# Altium PCB LM35_7107.PcbDoc
Units mm, origin at the board's own origin, x right, y up, seen from the top; angles counter-clockwise.
Board outline 62.81 x 59.51 mm, 2 copper layers (Top Layer, Bottom Layer); 30 components, 48 nets, 138 pads, 26 vias.
Unrouted connection lines stored in the file: 1.
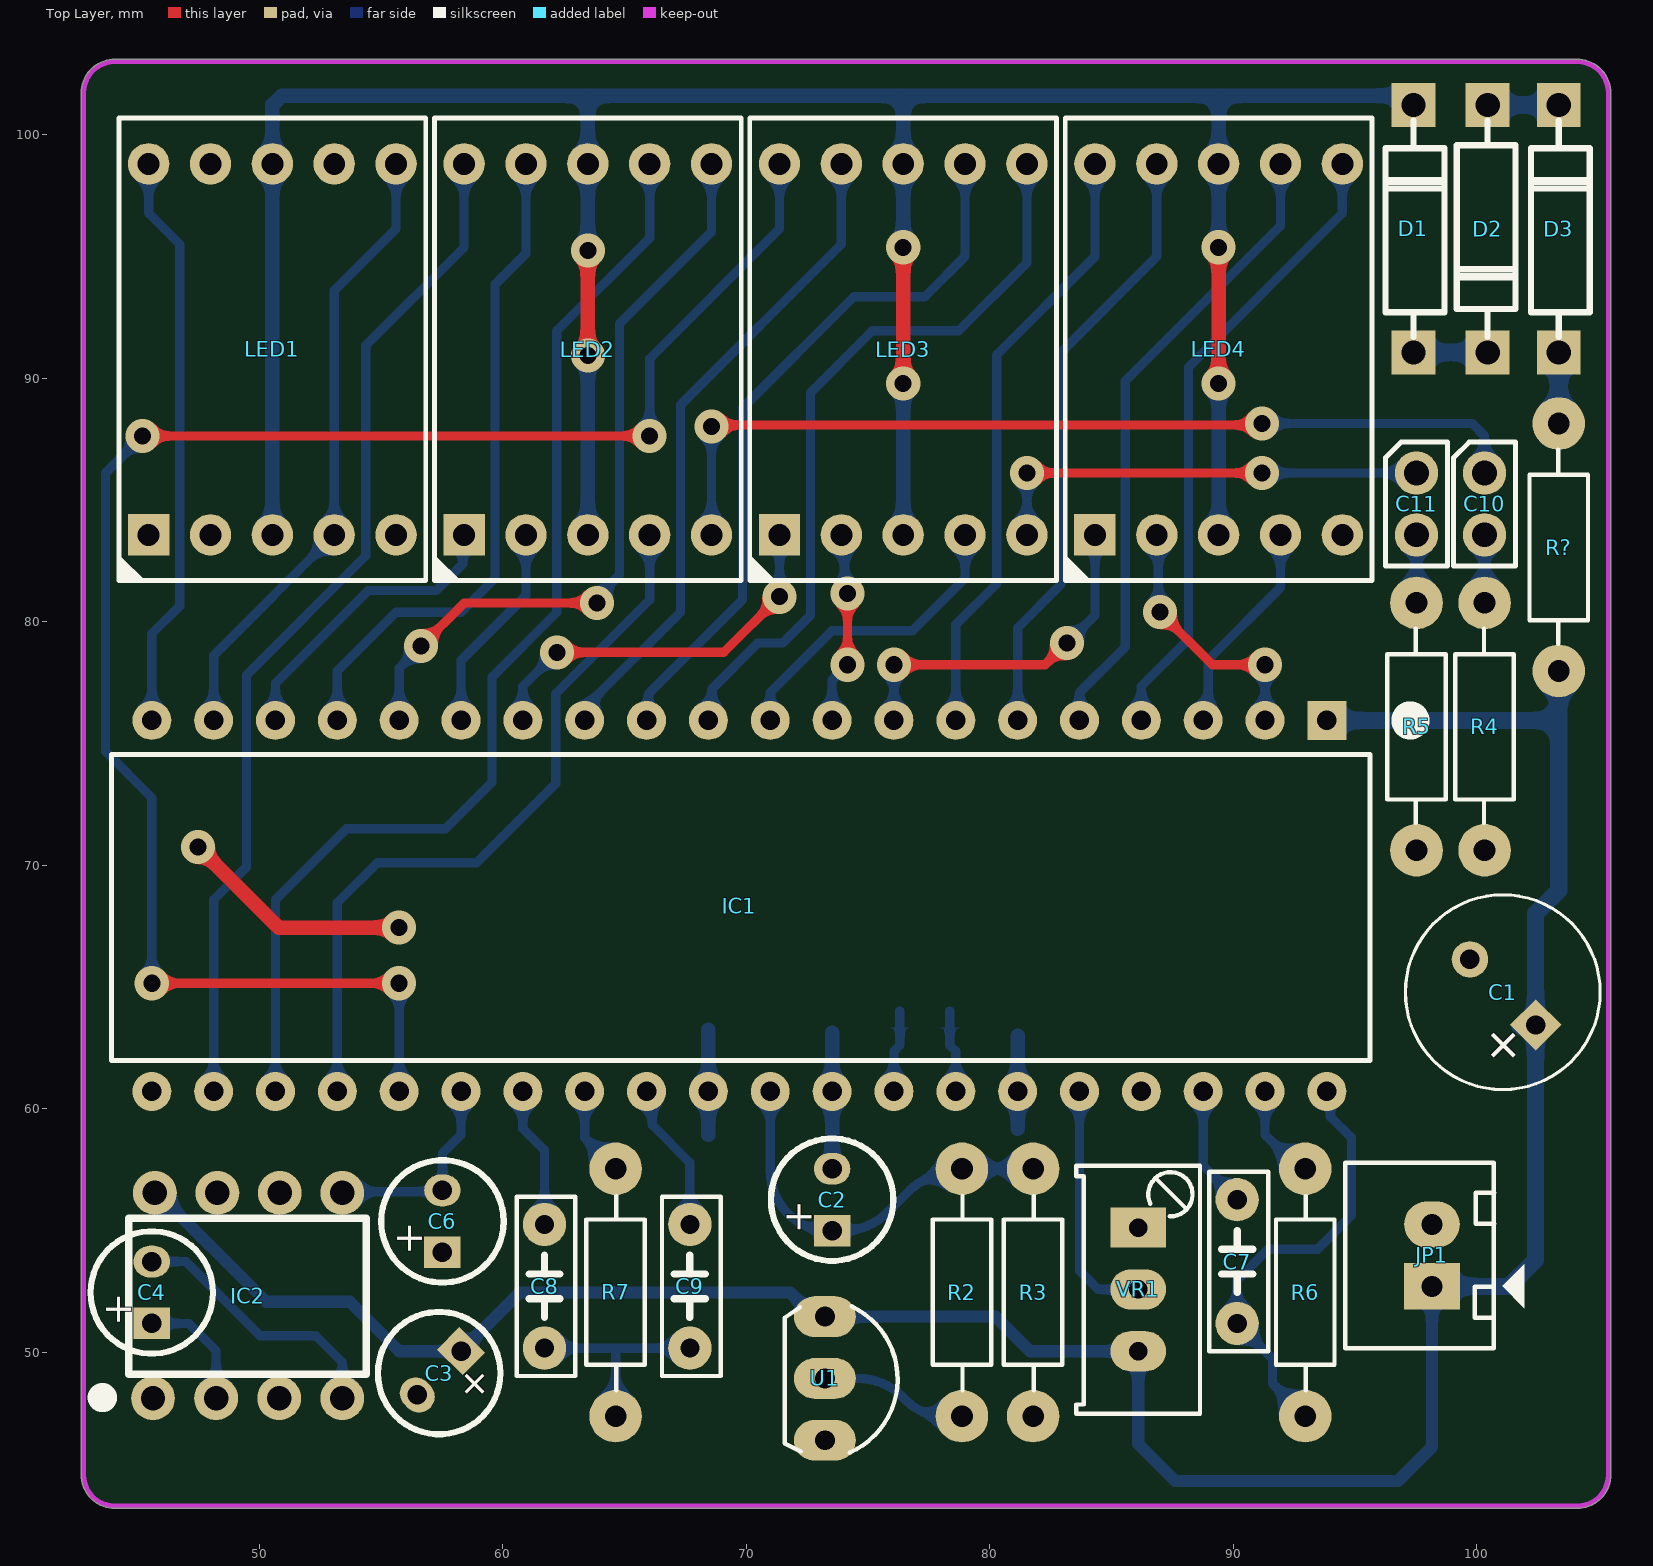
[diagram p0: Top Layer view]
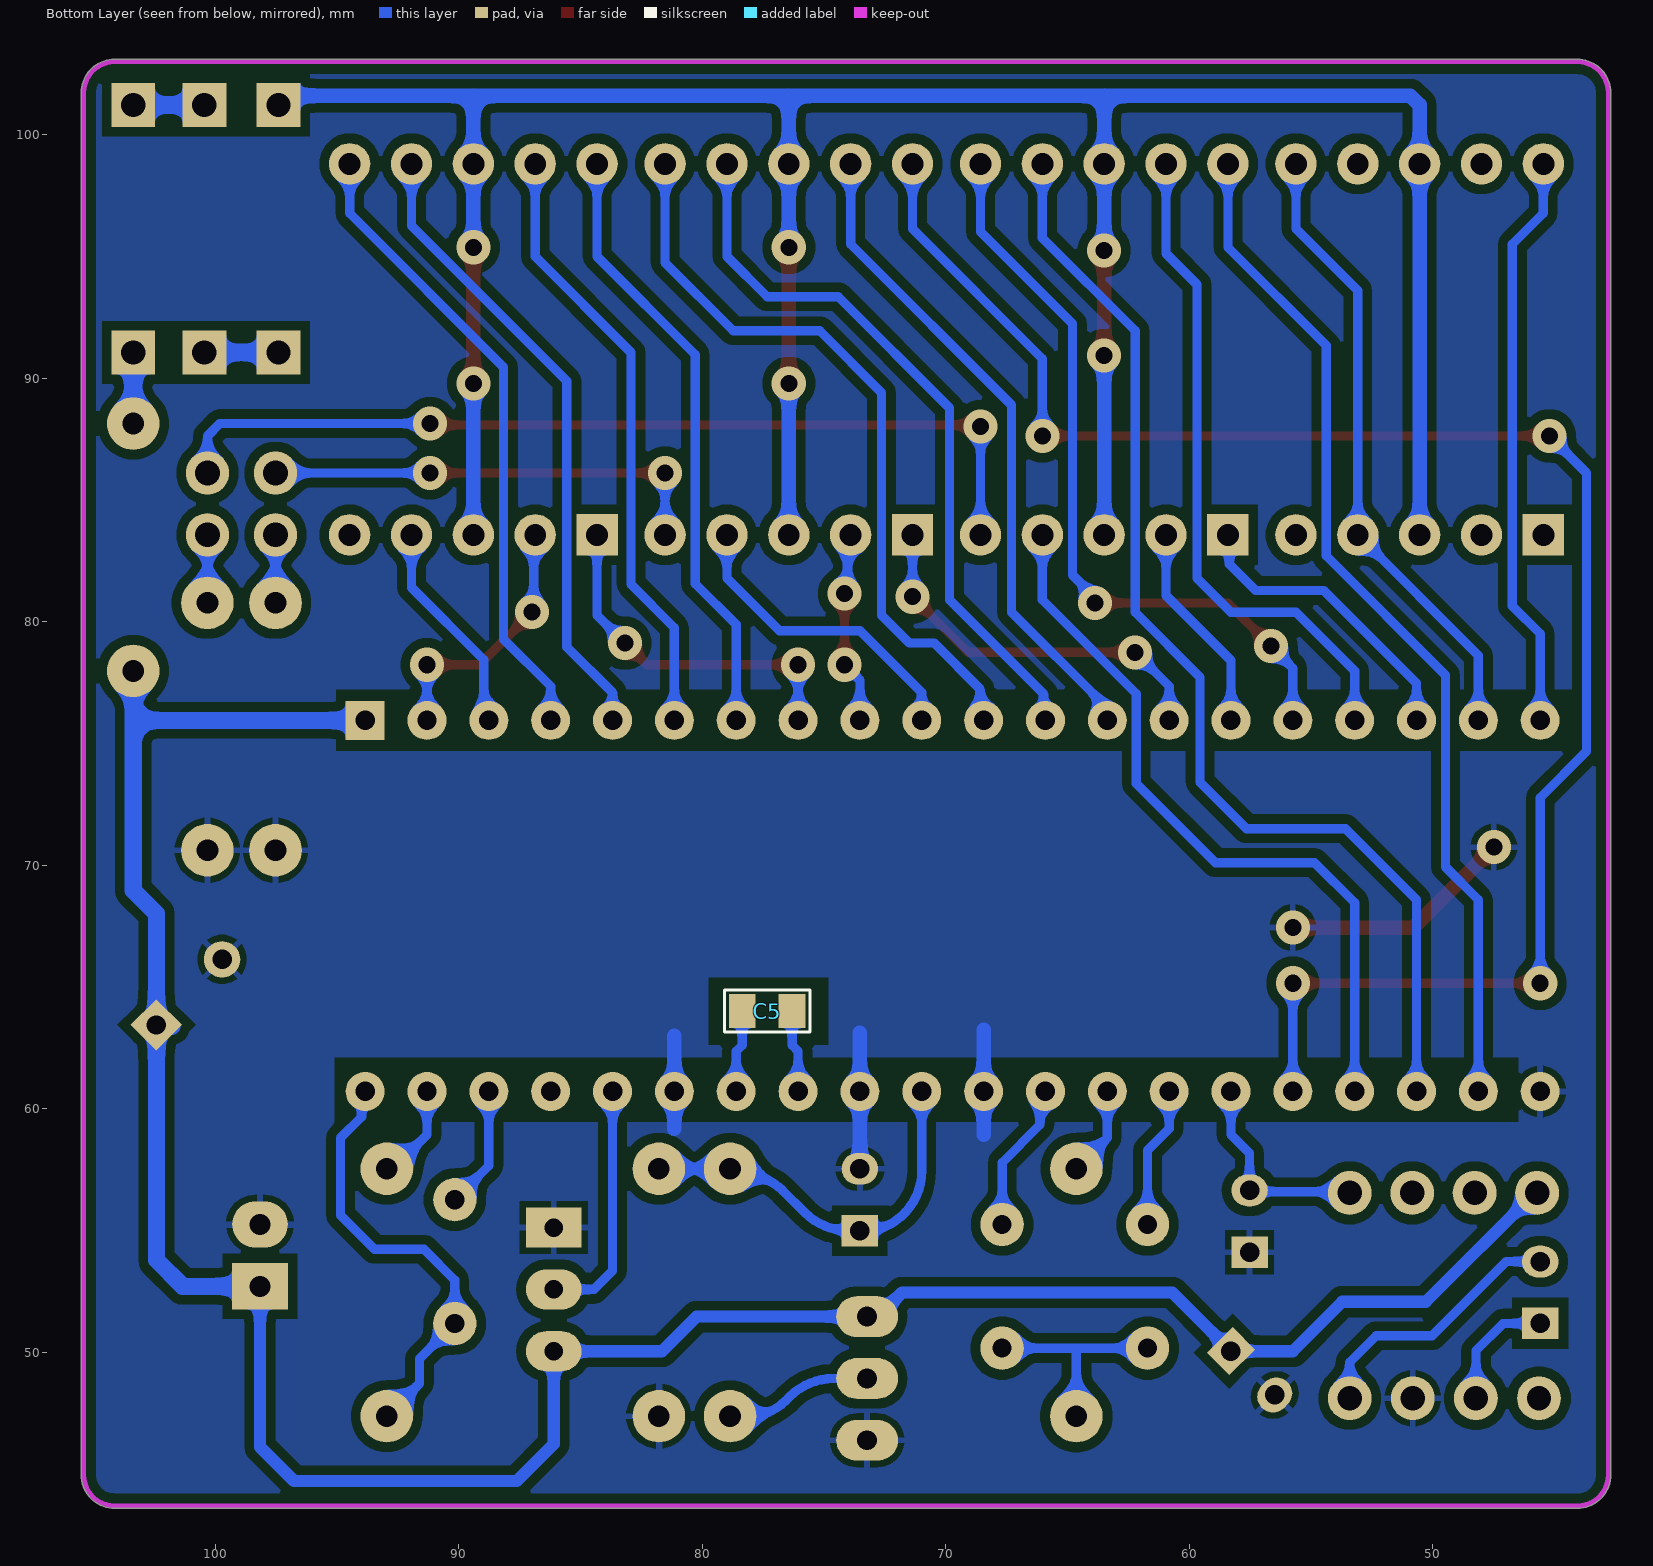
[diagram p1: Bottom Layer view, seen from below]
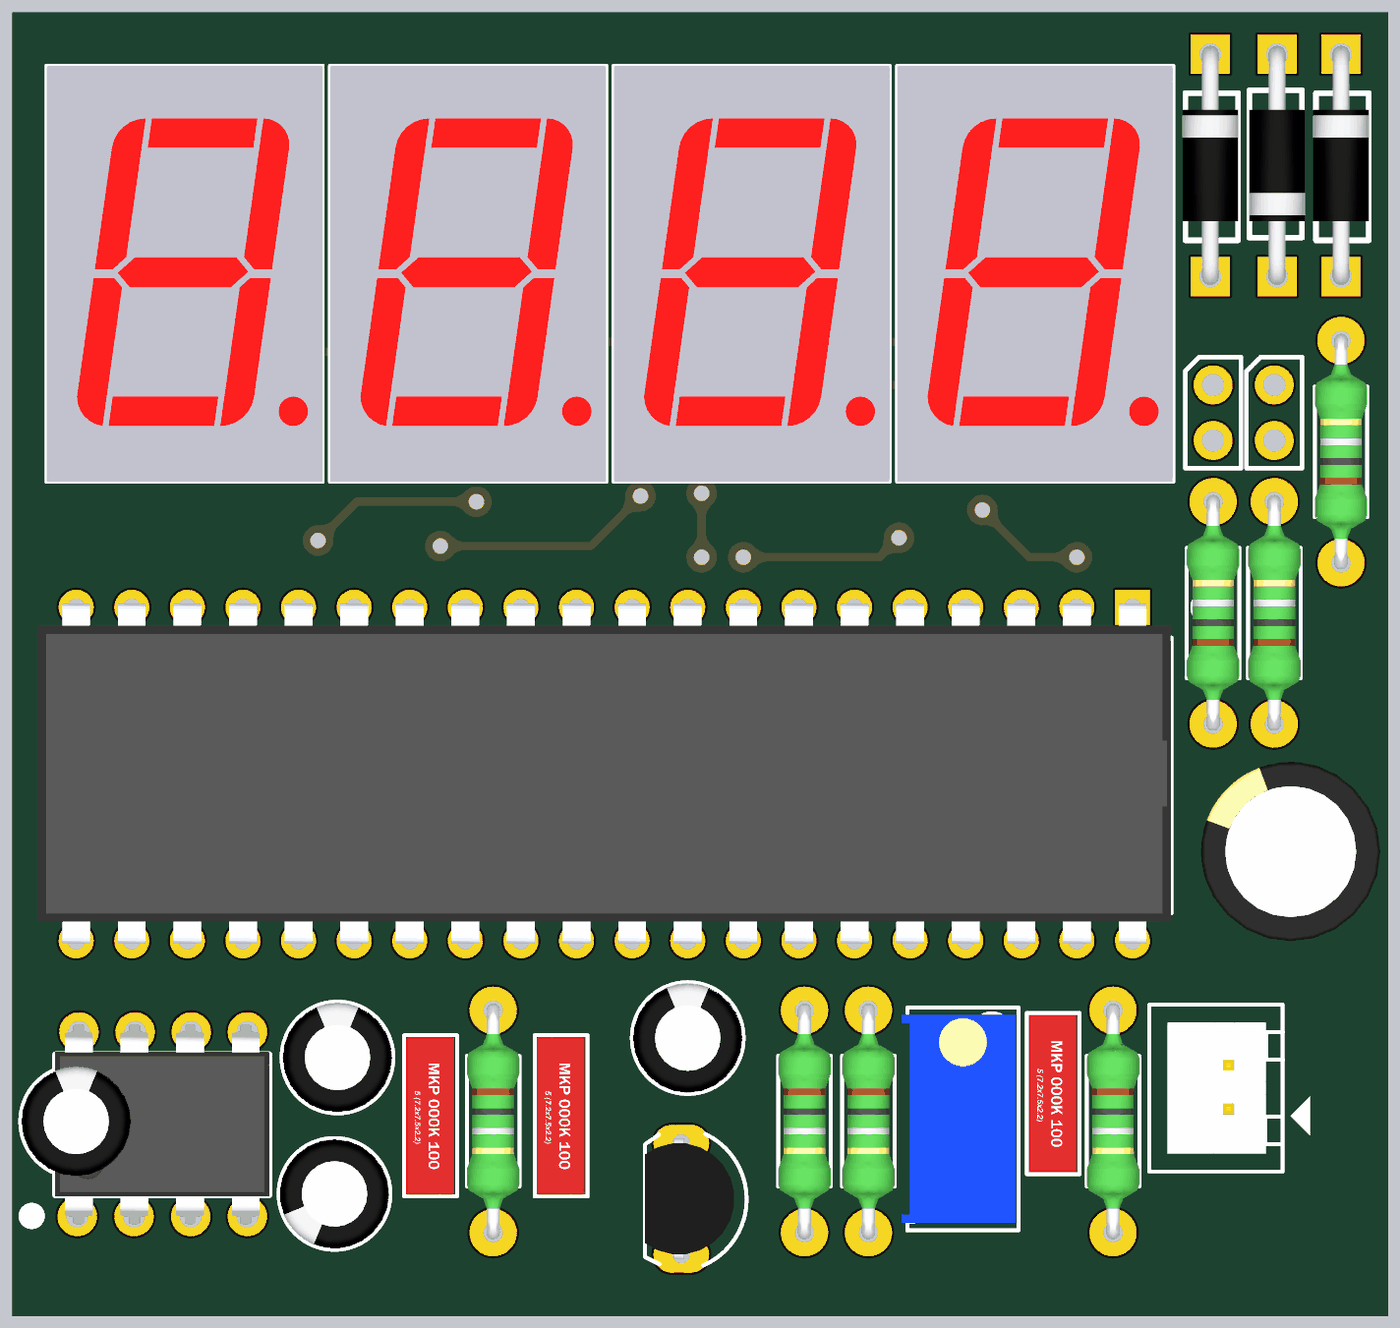
[diagram p2: 3D render of the assembled board from above, using the file's embedded part models]

## Layer stack, top to bottom
Top Solder: solder mask 0.0102, Solder Resist, Dk 3.5
Top Layer: signal copper 0.0356
Dielectric 1: dielectric 0.32, FR-4, Dk 4.8
Bottom Layer: signal copper 0.0356
Bottom Solder: solder mask 0.0102, Solder Resist, Dk 3.5

## Board outline
44.069,43.588 cw(c44.07,44.959) 42.699,44.957 42.699,46.736 42.699,44.958 42.699,101.727 cw(c44.069,101.727) 44.069,103.097 104.14,103.097 cw(c104.14,101.727) 105.51,101.727 105.51,101.092 105.51,45.467 105.51,44.958 cw(c104.14,44.958) 104.14,43.588

## Design rules (kind name [scope] priority, off if disabled: settings)
Clearance [All] p1: gap=0.4 ignorepadtopadclearanceinfootprint=FALSE except(0: Arc-Hole Track-Hole SMDPad-Hole THPad-Hole Via-Hole Fill-Hole Poly-Hole Region-Hole Text-Hole; 0.2: Arc-THPad Arc-Via Track-THPad Track-Via; 0.3: Arc-SMDPad Arc-Text Track-SMDPad Track-Text SMDPad-SMDPad SMDPad-THPad SMDPad-Via SMDPad-Text THPad-THPad THPad-Via THPad-Text Via-Via Via-Text Fill-Text Poly-Text Region-Text Text-Text; 0.35: Arc-Arc Arc-Track Track-Track)
PolygonConnect [All] p1: connectstyle=Relief reliefconductorwidth=0.254 reliefentries=4 polygonreliefangle="90 Angle" airgapwidth=0.254
RoutingVias [All] p1: holewidth=0.711 width=1.27 viastyle="Through Hole" minholewidth=0.711 minwidth=1.27 maxholewidth=0.711 maxwidth=1.27
SolderMaskExpansion [All] p1: expansion=0.102 istentingtop=FALSE
Width [All] p1: maxlimit=3 minlimit=0.254 preferedwidth=0.3
30 further rules are at their usual default settings.

## Components (designator, comment, footprint, x,y, rotation, side; value= is the part's Value field where it differs from the comment)
C1 "22uF" C8MM 101.078,64.784 r135 top value=?
C2 "2.2uF" C5mm 73.533,56.261 r90 top value=?
C3 "10uF" C5mm 57.395,49.14 r225 top value=?
C4 "10uF" C5mm 45.593,52.451 r90 top value=?
C5 "0.1uF" CN-SMD-0805 77.343,64.008 r180 bottom value=0,1uF/300V
C6 "47uF" C5mm 57.531,55.372 r90 top value=?
C7 "100pF" CN2-R 90.17,53.721 r90 top value=33pF
C8 "1uF" CN2-R 61.722,52.705 r90 top value=33pF
C9 "470nF" CN2-R 67.691,52.705 r90 top value=33pF
C10 "JP2" JP2-CLOSED 100.33,86.106 r0 top
C11 "JP2" JP2-CLOSED 97.536,86.106 r0 top
D1 "1N4148" DIODE/POW/1A 97.409,91.059 r90 top value=1N5007
D2 "1N4148" DIODE/POW/1A 100.457,101.219 r270 top value=1N5007
D3 "1N4148" DIODE/POW/1A 103.378,91.059 r90 top value=1N5007
IC1 "ICL7107" DIP-40 68.707,67.564 r270 top locked
IC2 "ICL7660" DIP-8 49.53,52.324 r90 top
JP1 "JP2" CON2 98.171,52.705 r90 top value="Connector 2"
LED1 "5611BS" "7SEG-0.56\""#1 50.546,91.186 r0 top locked
LED2 "5611BS" "7SEG-0.56\""#2 63.5,91.186 r0 top locked
LED3 "5611BS" "7SEG-0.56\""#2 76.454,91.186 r0 top locked
LED4 "5611BS" "7SEG-0.56\""#2 89.408,91.186 r0 top locked
R2 "10K" RES-1/4W 78.994,52.832 r90 top
R3 "?k" RES-1/4W 81.915,52.832 r90 top
R4 "220R" RES-1/4W 100.203,75.311 r270 top
R5 "220R" RES-1/4W 97.409,75.311 r270 top
R6 "100K" RES-1/4W 93.091,52.832 r90 top
R7 "210K" RES-1/4W 64.77,52.832 r90 top
R? "68R" RES-1/4W 103.251,82.677 r270 top
U1 "LM35" QTO-92 73.239,48.919 r270 top
VR1 "1K" VR2 86.106,55.118 r270 top

## Footprints (in the part's own frame and the unit in brackets; to place one, negate y for a bottom-side part, rotate by r counter-clockwise, add the part's x,y. Pads: shape width x height; smd on the part's side, far side on the other; paste and mask are expansions set on the pad)
"7SEG-0.56\""#1 [mm]
  rect 1.7x1.7 hole 0.9: 1(-5.08,-7.62)
  round 1.7 hole 0.9: 3(0,-7.62) 4(2.54,-7.62) 5(5.08,-7.62) 6(5.08,7.62) 7(2.54,7.62) 8(0,7.62) 9(-2.54,7.62) 10(-5.08,7.62) ""(-2.54,-7.62)
  silkscreen extent -6.3,-9.53 6.3,9.5, body extent -6.3,-9.5 6.3,9.5, height 8
"7SEG-0.56\""#2 [mm]
  rect 1.7x1.7 hole 0.9: 1(-5.08,-7.62)
  round 1.7 hole 0.9: 2(-2.54,-7.62) 3(0,-7.62) 4(2.54,-7.62) 5(5.08,-7.62) 6(5.08,7.62) 7(2.54,7.62) 8(0,7.62) 9(-2.54,7.62) 10(-5.08,7.62)
  silkscreen extent -6.3,-9.53 6.3,9.5, body extent -6.3,-9.5 6.3,9.5, height 8
C5mm [mm]
  rect 1.3x1.5 hole 0.8: 1(-1.27,0)
  oval 1.3x1.5 hole 0.8: 2(1.27,0)
  silkscreen extent -2.51,-2.51 2.51,2.51, body extent -2.5,-2.5 2.49,2.5, height 11.01
C8MM [mm]
  rect 1.5x1.5 hole 0.8: 1(-1.905,0)
  round 1.5 hole 0.8: 2(1.905,0)
  silkscreen extent -4,-4 4,4, body extent -4.1,-4.1 4.1,4.1, height 14.4
CN2-R [mil]
  round 70 hole 31: 1(-100,0) 2(100,0)
  silkscreen extent -145,-50 145,45, body extent -142,-45 142,42, height 336
CN-SMD-0805 [mm]
  rect 1.1x1.4 smd: 1(-1.025,0) 2(1.025,0)
  silkscreen extent -1.75,-0.86 1.75,0.86, body extent -1,-0.63 1,0.62, height 0.8
CON2 [mil] "CON2"
  rect 75x90 hole 34: 1(0,0)
  oval 75x90 hole 34: 2(100,0)
  silkscreen extent -100,-150 200,140, body extent -68,-70 168,107, height 236
DIODE/POW/1A [mm]
  rect 1.8x1.8 hole 1: 1(0,0) 2(10.16,0)
  silkscreen extent 0.64,-1.27 9.53,1.14, body extent -0.38,-1.28 10.54,1.28, height 2.55
DIP-8 [mm]
  round 1.8 hole 1: 1(-4.216,3.886) 2(-4.216,1.295) 3(-4.216,-1.295) 4(-4.216,-3.886) 5(4.216,-3.886) 6(4.216,-1.321) 7(4.216,1.245) 8(4.216,3.81)
  silkscreen extent -4.29,-4.88 3.17,6.07, body extent -4.57,-4.9 4.57,4.9, height 4.6
DIP-40 [mm]
  rect 1.6x1.6 hole 0.8: 1(-8.382,25.146)
  round 1.6 hole 0.8: 2(-8.382,22.606) 3(-8.382,20.066) 4(-8.382,17.526) 5(-8.382,14.986) 6(-8.382,12.446) 7(-8.382,9.906) 8(-8.382,7.366) 9(-8.382,4.826) 10(-8.382,2.286) 11(-8.382,-0.254) 12(-8.382,-2.794) 13(-8.382,-5.334) 14(-8.382,-7.874) 15(-8.382,-10.414) 16(-8.382,-12.954) 17(-8.382,-15.494) 18(-8.382,-18.034) 19(-8.382,-20.574) 20(-8.382,-23.114) 21(6.858,-23.114) 22(6.858,-20.574) 23(6.858,-18.034) 24(6.858,-15.494) 25(6.858,-12.954) 26(6.858,-10.414) 27(6.858,-7.874) 28(6.858,-5.334) 29(6.858,-2.794) 30(6.858,-0.254) 31(6.858,2.286) 32(6.858,4.826) 33(6.858,7.366) 34(6.858,9.906) 35(6.858,12.446) 36(6.858,14.986) 37(6.858,17.526) 38(6.858,20.066) 39(6.858,22.606) 40(6.858,25.146)
  silkscreen extent -8.67,-24.77 5.59,28.86, body extent -8.55,-24.86 6.98,26.89, height 6.35
JP2-CLOSED [mil]
  round 70 hole 40: 1(0,0) 2(0,-100)
  silkscreen extent -50,-150 50,50, body extent -50,-152 50,50, height 300
QTO-92 [mil] "TO-92"
  oval 66x100 hole 32: 1(-100,0) 2(0,0) 3(100,0)
  silkscreen extent -117,-65 120,118, body extent -109,-66 109,95, height 245
RES-1/4W [mil]
  round 85 hole 35: 1(-215,5) 2(185,5)
  silkscreen extent -173,-42 141,52, body extent -227,-42 197,52, height 95
VR2 [mil] "Variable Resistor"
  rect 65x90 hole 30: 1(0,0)
  oval 65x90 hole 30: 2(100,0) 3(200,0)
  silkscreen extent -100,-100 301,100, body extent -88,-111 288,95, height 460

## Part data
C1 C2 C3 C4 C6: library part CAP-Radial, "CAP-Radial", LatestRevisionDate=17-Jul-2002, LatestRevisionNote="Re-released for DXP Platform.", PackageReference=POLAR0.8, Published=8-Jun-2000, Publisher="Altium Limited"
C5: library part "CAP SMD", "CAP SMD", Designed by=VanDungEvn
C7 C8 C9: library part CAP-gom, "CAP-gom"
C10 C11: "WR-PHD 2.54 mm Angled Socket Header", Manufacturer="W¨¹rth Elektronik eiSos GmbH", partNo=613002143121, ComponentLink1 Description=Manufacturer, ComponentLink1URL=http://www.we-online.com, ComponentLink2 Description=Datasheet, ComponentLink2URL=http://katalog.we-online.de/em/datasheet/6130xx143121.pdf, Created by="Karrer Zheng", Created Date="29 March 2013", NoPins=02
D1 D2 D3: library part Diode-1N4148, "Default Diode", Code - JEDEC=DO-214-AB, Published=8-Jun-2000, Publisher="Altium Limited", Revision="July-2002: Re-released for DXP Platform."
IC1: "31/2 Digit, LCD/LED Display, A/D Converters"
JP1: library part Con2, "Connector 2"
R2 R3 R4 R5 R6 R7 R?: library part R, "Resistor R1/4W"
U1: "Teminal"
VR1: library part VR, "Var Resistor RM065", RM065-103=1K, RM065-104=10K, RM065-503=5K

## Via types
v1: diameter 1.4, hole 0.7, Top Layer to Bottom Layer, tented both sides, 26 vias

## Nets (pads, with @x,y where several pads share a name; then routed paths per layer and width w, separated by ;. In a path a pad name is that pad's centre, name@x,y a point inside that pad or via, vN(x,y) a via of type N, cw(c..) or ccw(c..) an arc to the next point about the centre after c; other vN are vias at no path point)
+5V: C1.1 C3.1 IC1.1 IC2.8 JP1.1 R?.2 U1.1 VR1.3 | length 108.2
  Bottom Layer w0.5: IC2.8 45.822,56.54 50.292,52.07 53.721,52.07 55.753,50.038 C3.1 60.706,52.451 71.805,52.451 72.797,51.459 U1.1 80.24,51.459 81.661,50.038 VR1.3@86.112,50.038 ; VR1.3 86.106,46.228 87.63,44.704 96.774,44.704 98.171,46.101 JP1.1
  Bottom Layer w0.7: IC1.1 103.378,75.946 ; JP1.1 101.346,52.705 102.425,53.785 C1.1 ; C1.1@101.796,63.373 101.86,63.436 C1.1 ; R?.2 103.378,75.946 ; C1.1 102.425,68.008 103.378,68.961 103.378,75.946
ADC_IN: C2.1 IC1.31 R2.2 R3.2 | length 16
  Bottom Layer w0.381: IC1.31 70.993,57.452 70.993,57.45 ccw(c73.492,57.45) C2.1@73.327,54.956 ; C2.1 74.005,54.991 ccw(c74.005,57.531) 75.801,55.735 76.698,56.632 cw(c78.254,55.078) 78.254,57.277 R2.2@78.867,57.277 ; R2.2 R3.2
DOT1: C10.1 LED2.5 | length 38
  Top Layer w0.381: v1(68.58,88.011) 68.644,88.075 91.123,88.075 v1(91.186,88.138)
  Bottom Layer w0.381: LED2.5 v1(68.58,88.011) ; v1(91.186,88.138) 99.822,88.138 100.33,87.63 C10.1
DOT2: C11.1 LED3.5 | length 18.5
  Top Layer w0.381: v1(81.534,86.106) v1(91.186,86.106)
  Bottom Layer w0.381: LED3.5 v1(81.534,86.106) ; v1(91.186,86.106) C11.1
GND: C1.2 C2.2 C3.2 C6.1 IC1.21 IC1.30 IC1.32 IC1.35 IC2.3 JP1.2 R3.1 R4.2 R5.2 U1.3 VR1.1 | length 23.3
  Top Layer w0.6: v1(47.498,70.739) 50.8,67.437 v1(55.753,67.437)
  Bottom Layer w0.6: 68.453,58.928 IC1.30 68.453,63.246 ; C2.2 73.533,63.119 ; 81.153,59.182 81.153,62.992
NetC4_1: C4.1 IC2.2 | length 5.1
  Bottom Layer w0.381: C4.1 47.117,51.181 48.235,50.063 IC2.2
NetC4_2: C4.2 IC2.4 | length 11
  Bottom Layer w0.381: C4.2 46.99,53.721 50.038,50.673 52.324,50.673 53.416,49.581 IC2.4
NetC5_1: C5.1 IC1.34 | length 3.4
  Bottom Layer w0.381: C5.1 78.368,62.602 78.613,62.357 IC1.34
NetC5_2: C5.2 IC1.33 | length 3.4
  Bottom Layer w0.381: IC1.33 76.073,62.357 76.318,62.602 C5.2
NetC6_2: C6.2 IC1.26 IC2.5 | length 8.5
  Bottom Layer w0.381: IC2.5 53.467,56.591 57.48,56.591 C6.2 57.531,58.166 58.293,58.928 IC1.26
NetC7_1: C7.1 IC1.40 R6.1 | length 18
  Bottom Layer w0.381: R6.1 91.625,48.71 91.625,49.726 C7.1 90.17,52.959 91.44,54.229 93.472,54.229 94.869,55.626 94.869,58.801 93.997,59.673 93.997,60.562 IC1.40
NetC7_2: C7.2 IC1.38 | length 5
  Bottom Layer w0.381: IC1.38 88.773,57.658 C7.2
NetC8_1: C8.1 C9.1 R7.1 | length 8.8
  Bottom Layer w0.381: C8.1 64.706,50.165 ; R7.1 64.643,50.102 64.706,50.165 ; C9.1 64.706,50.165
NetC8_2: C8.2 IC1.27 | length 5.8
  Bottom Layer w0.381: IC1.27 60.833,59.182 61.722,58.293 C8.2
NetC9_2: C9.2 IC1.29 | length 6.2
  Bottom Layer w0.381: IC1.29 66.142,60.478 66.142,59.334 67.691,57.785 C9.2
NetC10_2: C10.2 R4.1 | length 2.8
  Bottom Layer w0.381: R4.1 C10.2
NetC11_2: C11.2 R5.1 | length 2.8
  Bottom Layer w0.381: R5.1 C11.2
NetD1_A: D1.1 D2.2 | length 3
  Bottom Layer w0.7: D1.1 D2.2
NetD1_K: D1.2 LED1.3 LED1.8 LED2.3 LED2.8 LED3.3 LED3.8 LED4.3 LED4.8 | length 118.9
  Top Layer w0.6: v1(63.5,90.932) v1(63.5,95.25) ; v1(76.454,89.789) v1(76.454,95.377) ; v1(89.408,89.789) v1(89.408,95.377)
  Bottom Layer w0.6: LED1.3 LED1.8 50.546,101.219 50.927,101.6 63.5,101.6 ; LED2.3 v1(63.5,90.932) ; v1(63.5,95.25) LED2.8 63.5,101.6 ; LED3.3 v1(76.454,89.789) ; v1(76.454,95.377) LED3.8 76.454,101.6 ; LED4.3 v1(89.408,89.789) ; v1(89.408,95.377) LED4.8 89.408,101.6 ; D1.2 97.028,101.6 89.408,101.6 ; 63.5,101.6 76.454,101.6 ; 76.454,101.6 89.408,101.6
NetD2_A: D2.1 D3.2 | length 2.9
  Bottom Layer w0.7: D2.1 D3.2
NetD3_A: D3.1 R?.1 | length 2.9
  Bottom Layer w0.7: R?.1 D3.1
NetIC1_2: IC1.2 LED4.2 | length 10.5
  Top Layer w0.381: v1(86.995,80.391) 89.154,78.232 v1(91.313,78.232)
  Bottom Layer w0.381: LED4.2 86.931,83.502 86.931,80.454 v1(86.995,80.391) ; IC1.2 v1@91.313,77.978
NetIC1_3: IC1.3 LED4.4 | length 8.9
  Bottom Layer w0.381: IC1.3 88.981,76.154 88.981,78.44 91.948,81.407 LED4.4
NetIC1_4: IC1.4 LED4.6 | length 26.3
  Bottom Layer w0.381: IC1.4 86.233,77.343 88.167,79.277 88.167,90.453 94.488,96.774 LED4.6
NetIC1_5: IC1.5 LED4.7 | length 26.3
  Bottom Layer w0.381: IC1.5 83.698,75.951 83.698,77.094 85.569,78.965 85.569,89.887 91.948,96.266 LED4.7
NetIC1_6: IC1.6 LED4.9 | length 25.2
  Bottom Layer w0.381: IC1.6 81.153,79.756 82.931,81.534 82.931,91.059 86.868,94.996 LED4.9
NetIC1_7: IC1.7 LED4.10 | length 25.2
  Bottom Layer w0.381: IC1.7 78.613,79.883 80.293,81.563 80.293,90.961 84.328,94.996 LED4.10
NetIC1_8: IC1.8 LED4.1 | length 14.7
  Top Layer w0.381: v1(76.073,78.232) 82.276,78.232 83.165,79.121 v1(83.185,79.121)
  Bottom Layer w0.381: IC1.8 v1(76.073,78.232) ; v1(83.185,79.121) 84.328,80.264 LED4.1
NetIC1_9: IC1.9 LED3.2 | length 8
  Top Layer w0.381: v1(74.168,78.232) v1(74.168,81.153)
  Bottom Layer w0.381: IC1.9 73.533,77.597 v1(74.168,78.232) ; LED3.2 74.041,83.439 74.041,81.28 v1(74.168,81.153)
NetIC1_10: IC1.10 LED3.4 | length 12.9
  Bottom Layer w0.381: IC1.10 70.998,75.951 70.998,77.094 73.533,79.629 76.835,79.629 78.994,81.788 LED3.4
NetIC1_11: IC1.11 LED3.6 | length 31
  Bottom Layer w0.381: IC1.11 68.597,76.09 68.597,77.233 70.485,79.121 71.501,79.121 72.644,80.264 72.644,89.408 75.184,91.948 78.74,91.948 81.534,94.742 LED3.6
NetIC1_12: IC1.12 LED3.7 | length 30
  Bottom Layer w0.381: IC1.12 65.994,76.027 65.994,77.043 69.85,80.899 69.85,88.773 74.422,93.345 77.343,93.345 78.994,94.996 LED3.7
NetIC1_13: IC1.13 LED3.9 | length 27.2
  Bottom Layer w0.381: IC1.13 63.606,76.179 63.606,76.687 67.31,80.391 67.31,88.9 73.914,95.504 LED3.9
NetIC1_14: IC1.14 LED3.1 | length 16
  Top Layer w0.381: v1(62.23,78.74) 69.088,78.74 v1(71.374,81.026)
  Bottom Layer w0.381: IC1.14 60.833,77.343 v1(62.23,78.74) ; v1(71.374,81.026) LED3.1
NetIC1_15: IC1.15 LED2.2 | length 8.7
  Bottom Layer w0.381: IC1.15 58.293,78.409 60.96,81.076 LED2.2
NetIC1_16: IC1.16 LED2.6 | length 31.4
  Top Layer w0.381: v1(56.642,78.994) 58.42,80.772 v1(63.881,80.772)
  Bottom Layer w0.381: IC1.16 55.753,78.085 56.642,78.974 v1(56.642,78.994) ; v1(63.881,80.772) 63.881,81.003 64.799,81.921 64.799,92.231 68.58,96.012 LED2.6
NetIC1_17: IC1.17 LED2.9 | length 27.6
  Bottom Layer w0.381: IC1.17 53.213,77.978 55.626,80.391 58.293,80.391 59.69,81.788 59.69,93.853 60.96,95.123 LED2.9
NetIC1_18: IC1.18 LED2.1 | length 12.5
  Bottom Layer w0.381: IC1.18 50.673,77.47 54.483,81.28 57.277,81.28 58.365,82.368 58.365,83.511 LED2.1
NetIC1_19: IC1.19 LED1.4 LED1.6 | length 26.1
  Bottom Layer w0.381: 48.006,83.566 48.07,83.502 ; IC1.19 48.133,78.613 LED1.4 53.086,93.599 55.626,96.139 LED1.6
NetIC1_20: IC1.20 LED1.10 | length 23.9
  Bottom Layer w0.381: LED1.10 45.466,96.774 46.736,95.504 46.736,80.645 45.593,79.502 IC1.20
NetIC1_22: IC1.22 LED2.10 | length 42.4
  Bottom Layer w0.381: IC1.22 48.133,68.58 49.483,69.93 49.483,77.804 54.385,82.706 54.385,91.342 58.42,95.377 LED2.10
NetIC1_23: IC1.23 LED2.7 | length 46.8
  Bottom Layer w0.381: IC1.23 50.673,68.58 53.594,71.501 57.658,71.501 59.563,73.406 59.563,77.724 62.23,80.391 62.23,91.948 66.04,95.758 LED2.7
NetIC1_24: IC1.24 LED2.4 | length 30.6
  Bottom Layer w0.381: IC1.24 53.213,68.453 54.864,70.104 58.928,70.104 62.183,73.359 62.183,77.042 66.04,80.899 LED2.4
NetIC1_25: IC1.25 LED3.10 | length 72.7
  Top Layer w0.381: v1(45.212,87.63) v1(66.04,87.63) ; v1(45.593,65.151) v1(55.753,65.151)
  Bottom Layer w0.381: v1(45.212,87.63) 43.688,86.106 43.688,74.676 45.593,72.771 v1(45.593,65.151) ; IC1.25 v1(55.753,65.151) ; v1(66.04,87.63) 66.04,90.805 71.374,96.139 LED3.10
NetIC1_28: IC1.28 R7.2 | length 3.7
  Bottom Layer w0.381: IC1.28 63.373,58.801 R7.2
NetIC1_36: IC1.36 VR1.2 | length 10.1
  Bottom Layer w0.381: IC1.36 83.693,53.34 84.455,52.578 VR1.2
NetIC1_39: IC1.39 R6.2 | length 4
  Bottom Layer w0.381: IC1.39 91.313,58.933 92.715,57.531 R6.2
NetR2_1: R2.1 U1.2 | length 6.8
  Bottom Layer w0.381: U1.2@73.934,48.969 73.921,48.968 U1.2 74.616,48.919 cw(c74.616,46.379) 76.412,48.175 76.581,48.006 ccw(c78.114,49.539) 78.114,47.371 R2.1
pads on no net: IC1.37 IC2.1 IC2.6 IC2.7 LED1. LED1.1 LED1.5 LED1.7 LED1.9 LED4.5

## Polygon pours and split planes (outlines as drawn)
GND on Bottom Layer "GND_L02_P000" (solid, pour order 0): 104.14,102.997 cw(c104.14,101.727) 105.41,101.727 105.41,44.958 cw(c104.14,44.958) 104.14,43.688 43.969,43.688 cw(c43.969,44.858) 42.799,44.858 42.799,101.727 cw(c44.069,101.727) 44.069,102.997

## Keep-outs
Keep-Out Layer:
  lines w0.2: 42.799,46.736 42.799,44.958 ; 46.863,102.997 44.069,102.997 ; 105.41,45.466 105.41,44.958 ; 105.41,101.092 105.41,101.727 ; 42.799,44.958 ccw(c44.069,44.958) 44.069,43.688 104.14,43.688 ccw(c104.14,44.958) 105.41,44.958 ; 42.799,44.958 42.799,101.727 cw(c44.069,101.727) 44.069,102.997 ; 44.069,102.997 104.14,102.997 cw(c104.14,101.727) 105.41,101.727 ; 105.41,44.958 105.41,101.727

## Other copper
Bottom Layer:
  pour cut-out: 46.482,62.103 95.123,62.103 95.123,59.436 46.482,59.436
  pour cut-out: 44.069,77.216 95.053,77.216 95.053,74.676 44.069,74.676
  pour cut-out: 96.109,92.359 104.678,92.359 104.678,89.759 96.109,89.759
  pour cut-out: 96.109,102.487 104.678,102.487 104.678,99.919 96.109,99.919
  pour cut-out: 79.756,65.405 79.756,62.611 74.803,62.611 74.803,65.405

## Text inside footprints (layer, text, board x,y; h text height)
C1: Top Overlay "+" at 102.156,62.449 h1.5 r135
C2: Top Overlay "+" at 72.695,54.864 h1.2 r90
C3: Top Overlay "+" at 58.976,49.535 h1.2 r225
C4: Top Overlay "+" at 44.755,51.054 h1.2 r90
C6: Top Overlay "+" at 56.693,53.975 h1.2 r90